# EAGLE board uClouds_SE_Button_Shim (EAGLE 9.5.2)
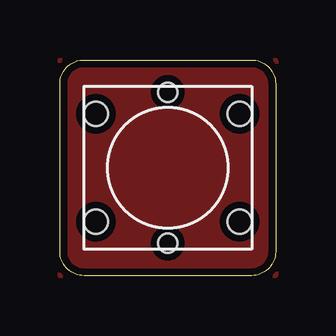
[diagram p0: board, top side]
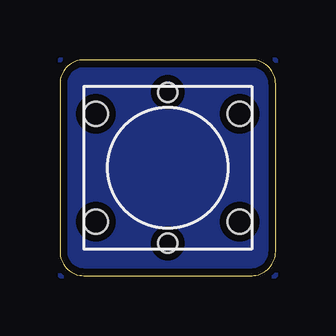
[diagram p1: board, bottom side, seen from below]

Size 9 x 9 mm. Coordinates in mm from the lower left corner, seen from the top.
Outline: 0,1 0,8 arc-90 1,9 8,9 arc-90 9,8 9,1 arc-90 8,0 1,0 arc-90 0,1
Copper layers (1*16): Top 0.035mm / dielectric 1.5mm / Bottom 0.035mm
Design rules "default *": minimum track width 6mil, minimum drill 0.35mm, track to track 6mil, track to pad 6mil, pad to pad 6mil, via to via 6mil, smd to smd 6mil, copper to edge 12mil, drill to drill 6mil, minimum pad ring 10mil, minimum via ring 8mil, stop-mask expansion 4mil, vias tented up to drill 0mil, thermal gap 10mil

## Footprints (pad centres in the part's own frame; a part is rotated, then mirrored left to right if it is on the bottom)
TL1265-HOLES = hole 1.016: -3,2.25; -3,-2.25; 3,-2.25; 3,2.25 | hole 0.8: 0,3.15; 0,-3.15

## Placement (x,y rotation side)
E$1  [TL1265-HOLES]  4.5,4.5 0 top

## Library data of the parts
E$1 = uClouds_SE_Library

## Tracks (layer width: path | path; a pad name or v marks a point on that pad's centre or on a via)
GND
  pour Top (isolate 0.2): 0,9 9,9 9,0 0,0
  pour Bottom (isolate 0.2): 0,9 9,9 9,0 0,0